# EAGLE board picodev (EAGLE 9.6.2)
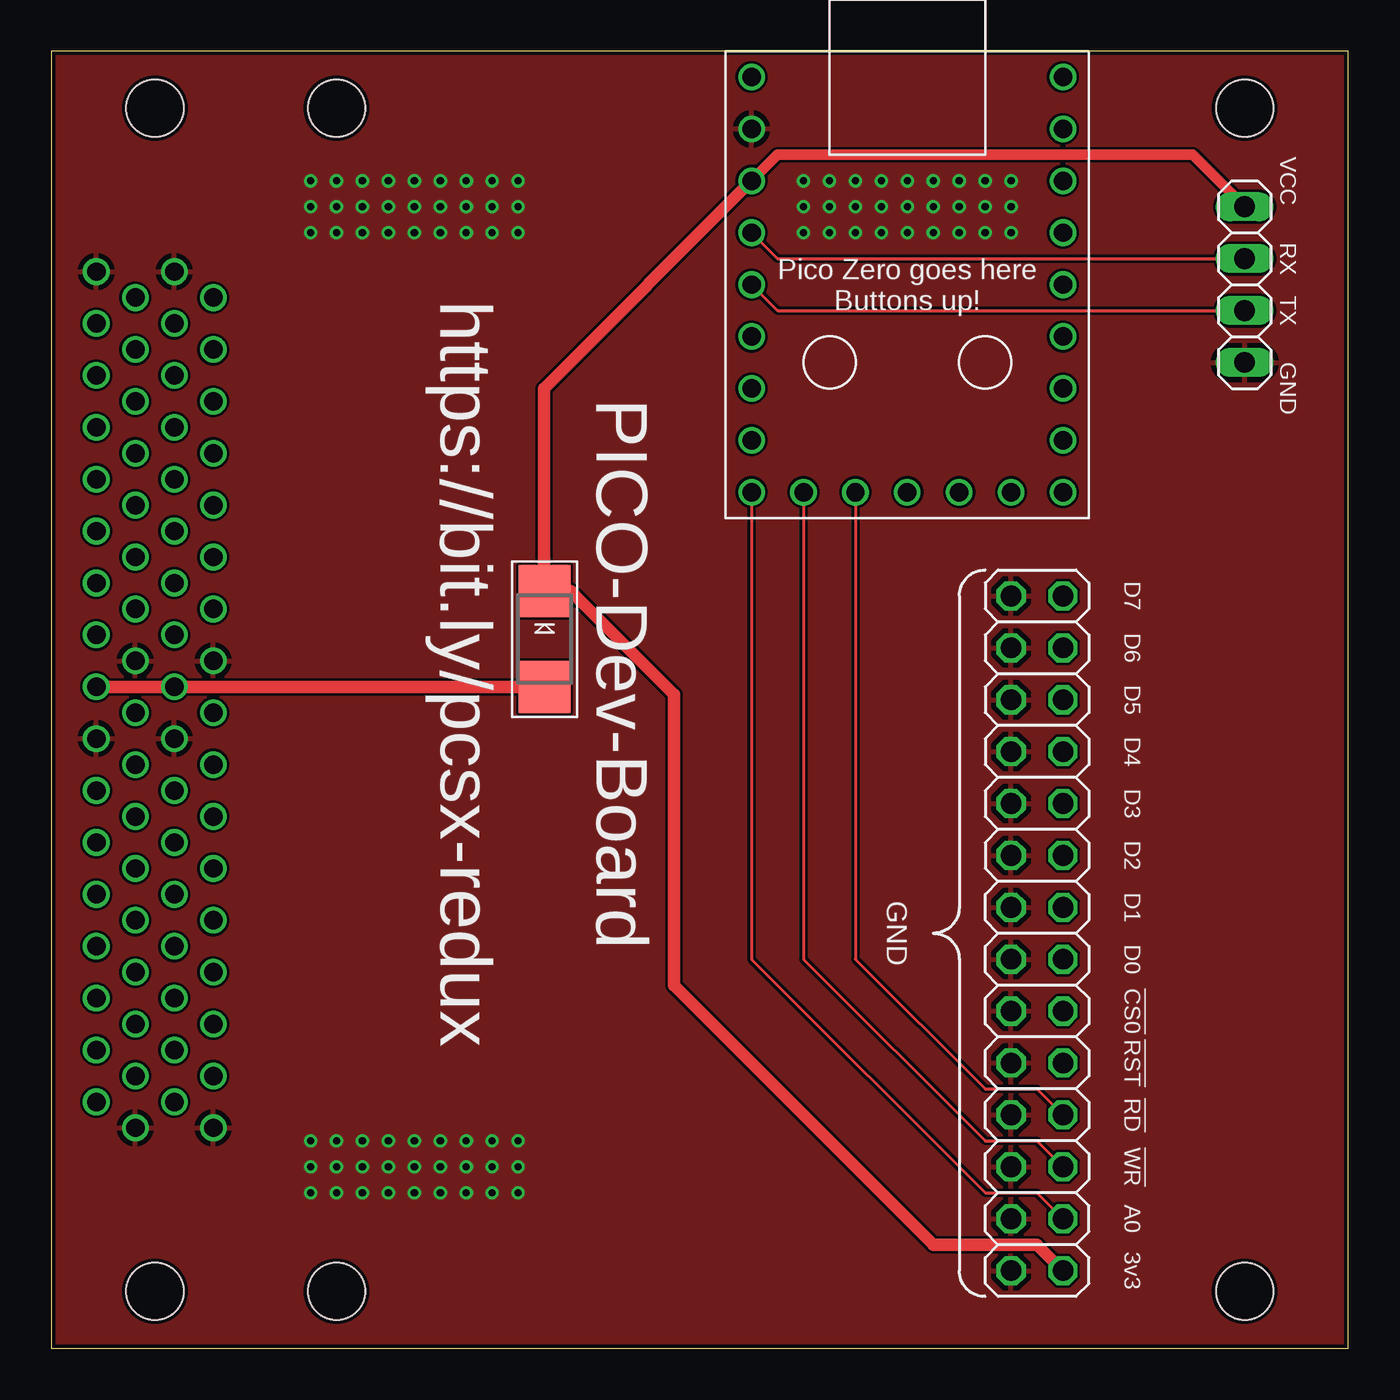
[diagram p0: board, top side]
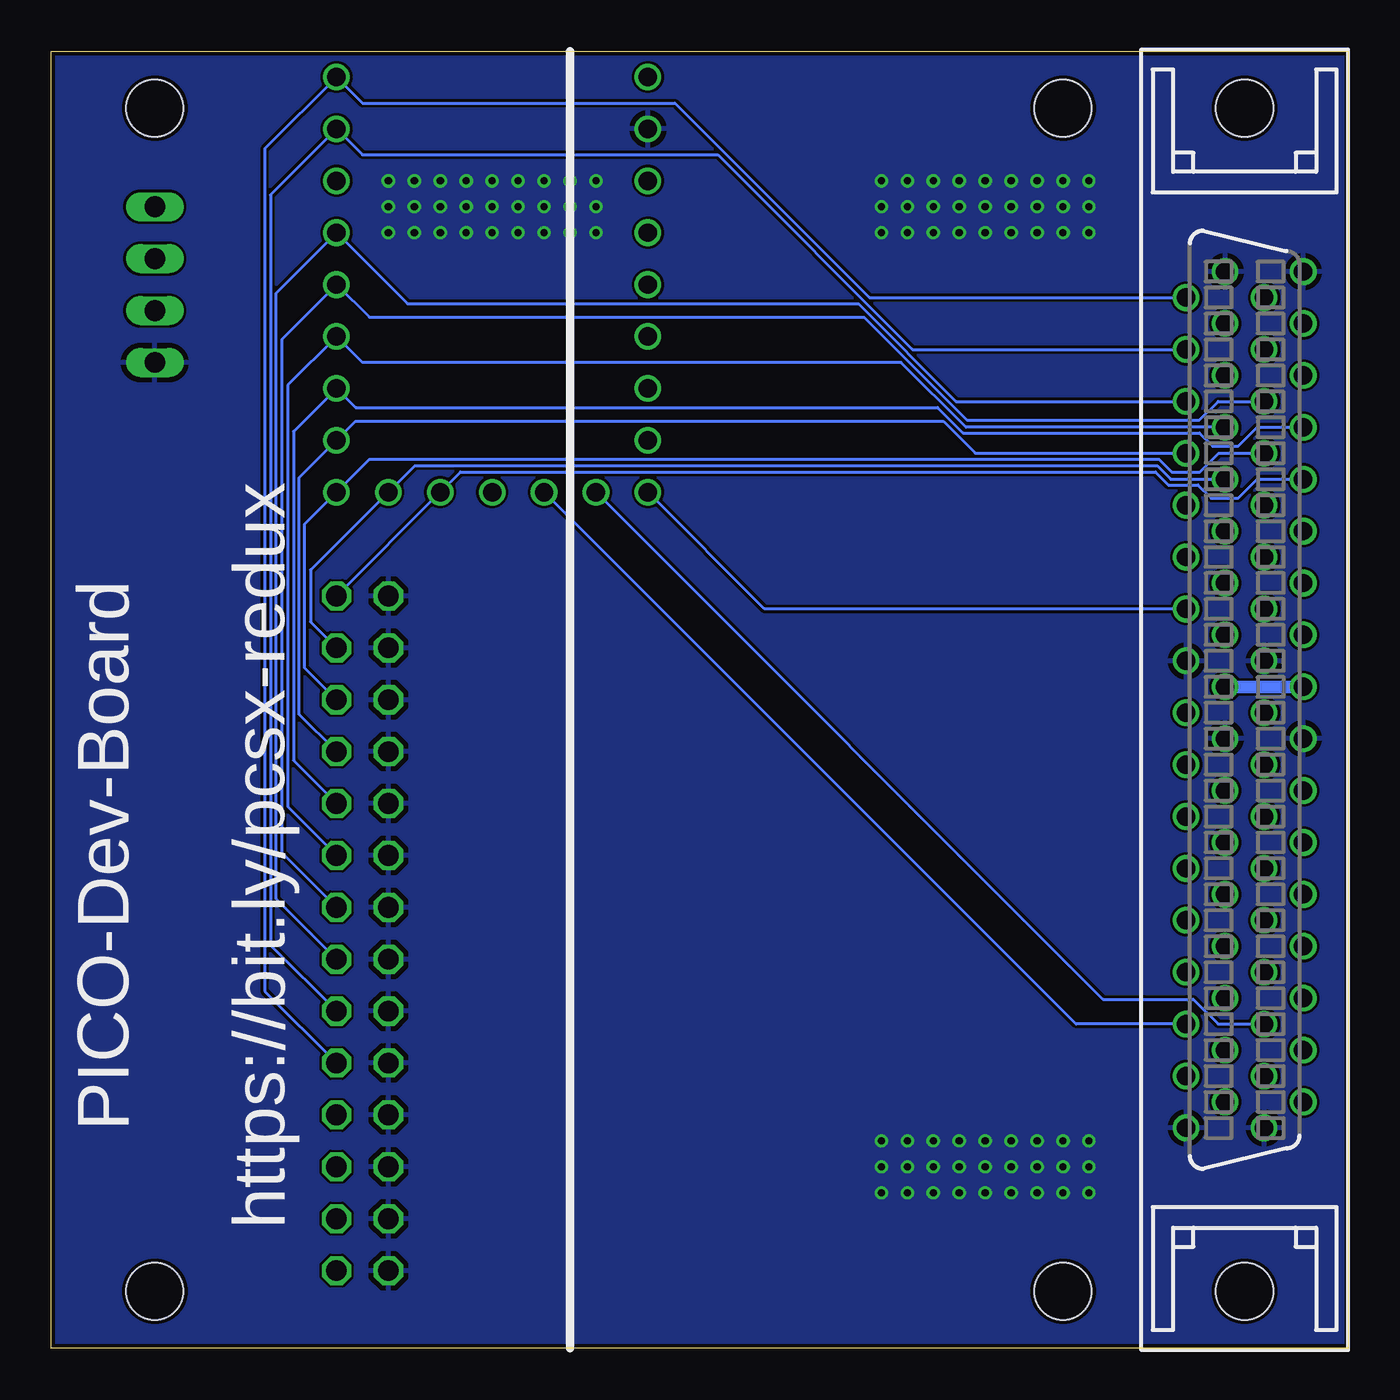
[diagram p1: board, bottom side, seen from below]

Size 63.5 x 63.5 mm. Coordinates in mm from the lower left corner, seen from the top.
Outline: 0,0 63.5,0 63.5,63.5 0,63.5 0,0
Copper layers (1*16): Top 0.035mm / dielectric 1.5mm / Bottom 0.035mm
Design rules "default *": minimum track width 5mil, minimum drill 0.2mm, track to track 5mil, track to pad 0.2mm, pad to pad 5mil, via to via 0.2mm, smd to smd 5mil, copper to edge 0.2mm, drill to drill 6mil, minimum pad ring 8mil, minimum via ring 0.15mm, stop-mask expansion 4mil, vias tented up to drill 25mil, thermal gap 10mil
Holes 2.79 mm at 58.42,60.71 58.42,2.79 13.97,60.71 13.97,2.79

## Footprints (pad centres in the part's own frame; a part is rotated, then mirrored left to right if it is on the bottom)
SMADIODE = smd 2.54 x 2.54: A 2.349,0; C -2.349,0
2X14 = drill 1.016 octagon: 1 -16.51,-1.27; 2 -16.51,1.27; 3 -13.97,-1.27; 4 -13.97,1.27; 5 -11.43,-1.27; 6 -11.43,1.27; 7 -8.89,-1.27; 8 -8.89,1.27; 9 -6.35,-1.27; 10 -6.35,1.27; 11 -3.81,-1.27; 12 -3.81,1.27; 13 -1.27,-1.27; 14 -1.27,1.27; 15 1.27,-1.27; 16 1.27,1.27; 17 3.81,-1.27; 18 3.81,1.27; 19 6.35,-1.27; 20 6.35,1.27; 21 8.89,-1.27; 22 8.89,1.27; 23 11.43,-1.27; 24 11.43,1.27; 25 13.97,-1.27; 26 13.97,1.27; 27 16.51,-1.27; 28 16.51,1.27
PIOCONN = drill 0.9 pad 1.27: 1 20.955,0.953; 2 19.685,2.863; 3 18.415,0.953; 4 17.145,2.863; 5 15.875,0.953; 6 14.605,2.863; 7 13.335,0.953; 8 12.065,2.863; 9 10.795,0.953; 10 9.525,2.863; 11 8.255,0.953; 12 6.985,2.863; 13 5.715,0.953; 14 4.445,2.863; 15 3.175,0.953; 16 1.905,2.863; 17 0.635,0.953; 18 -0.635,2.863; 19 -1.905,0.953; 20 -3.175,2.863; 21 -4.445,0.953; 22 -5.715,2.863; 23 -6.985,0.953; 24 -8.255,2.863; 25 -9.525,0.953; 26 -10.795,2.863; 27 -12.065,0.953; 28 -13.335,2.863; 29 -14.605,0.953; 30 -15.875,2.863; 31 -17.145,0.953; 32 -18.415,2.863; 33 -19.685,0.953; 34 -20.955,2.863; 35 20.955,-2.867; 36 19.685,-0.957; 37 18.415,-2.867; 38 17.145,-0.957; 39 15.875,-2.867; 40 14.605,-0.957; 41 13.335,-2.867; 42 12.065,-0.957; 43 10.795,-2.867; 44 9.525,-0.957; 45 8.255,-2.867; 46 6.985,-0.957; 47 5.715,-2.867; 48 4.445,-0.957; 49 3.175,-2.867; 50 1.905,-0.957; 51 0.635,-2.867; 52 -0.635,-0.957; 53 -1.905,-2.867; 54 -3.175,-0.957; 55 -4.445,-2.867; 56 -5.715,-0.957; 57 -6.985,-2.867; 58 -8.255,-0.957; 59 -9.525,-2.867; 60 -10.795,-0.957; 61 -12.065,-2.867; 62 -13.335,-0.957; 63 -14.605,-2.867; 64 -15.875,-0.957; 65 -17.145,-2.867; 66 -18.415,-0.957; 67 -19.685,-2.867; 68 -20.955,-0.957 | hole 2.8: -28.955,0; 28.955,0
PICO-ZERO = drill 0.9 pad 1.27: 1 7.62,10.16; 2 7.62,7.62; 3 7.62,5.08; 4 7.62,2.54; 5 7.62,0; 6 7.62,-2.54; 7 7.62,-5.08; 8 7.62,-7.62; 9 7.62,-10.16; 10 5.08,-10.16; 11 2.54,-10.16; 12 0,-10.16; 13 -2.54,-10.16; 14 -5.08,-10.16; 15 -7.62,-10.16; 16 -7.62,-7.62; 17 -7.62,-5.08; 18 -7.62,-2.54; 19 -7.62,0; 20 -7.62,2.54; 21 -7.62,5.08; 22 -7.62,7.62; 23 -7.62,10.16
1X04 = drill 1.016 long: 1 -3.81,0; 2 -1.27,0; 3 1.27,0; 4 3.81,0

## Placement (x,y rotation side)
D  SCHOTTKYSMA  [SMADIODE]  24.16,34.72 270 top
JP1  [2X14]  48.26,20.32 270 top
PIO  PIOCONNPIOCONN-S  [PIOCONN]  5.08,31.75 90 bottom
U$1  PICO-ZERO  [PICO-ZERO]  41.91,52.07 0 top
UART  [1X04]  58.42,52.07 90 top

## Library data of the parts
D PIO U$1 = pixel
JP1 UART = pinhead

## Nets
!CS0: JP1.18 PIO.4 U$1.2
!RD: JP1.22 PIO.30 U$1.13
!RESET: JP1.20 PIO.2 U$1.1
!WR: JP1.24 PIO.64 U$1.14
A0: JP1.26 PIO.14 U$1.15
A1: PIO.48
A2: PIO.15
A3: PIO.49
A4: PIO.20
A5: PIO.54
A6: PIO.21
A7: PIO.55
A8: PIO.22
A9: PIO.56
A10: PIO.23
A11: PIO.57
A12: PIO.24
A13: PIO.58
A14: PIO.25
A15: PIO.59
A16: PIO.26
A17: PIO.60
A18: PIO.27
A19: PIO.61
A20: PIO.28
A21: PIO.62
A22: PIO.29
A23: PIO.63
D0: JP1.16 PIO.6 U$1.4
D1: JP1.14 PIO.40 U$1.5
D2: JP1.12 PIO.7 U$1.6
D3: JP1.10 PIO.41 U$1.7
D4: JP1.8 PIO.8 U$1.8
D5: JP1.6 PIO.42 U$1.9
D6: JP1.4 PIO.9 U$1.10
D7: JP1.2 PIO.43 U$1.11
GND: JP1.1 JP1.3 JP1.5 JP1.7 JP1.9 JP1.11 JP1.13 JP1.15 JP1.17 JP1.19 JP1.21 JP1.23 JP1.25 JP1.27 PIO.1 PIO.16 PIO.19 PIO.34 PIO.35 PIO.50 PIO.53 PIO.68 U$1.22 UART.1
PIOVCC33: D.A PIO.17 PIO.51
RX: U$1.20 UART.3
TX: U$1.19 UART.2
VCC33: D.C JP1.28 U$1.21 UART.4

## Tracks (layer width: path | path; a pad name or v marks a point on that pad's centre or on a via)
!CS0
  Bottom 0.152: PIO.4 21.34,48.9 30.86,58.42 48.26,58.42 U$1.2 52.76,56.46 52.76,19.74 JP1.18
!RD
  Top 0.152: JP1.22 48.26,12.7 45.72,12.7 39.37,19.05 U$1.13
  Bottom 0.152: PIO.30 13.34,15.88 U$1.13
!RESET
  Bottom 0.152: PIO.2 23.44,51.44 32.97,60.96 48.26,60.96 U$1.1 53.03,58.73 53.03,17.48 JP1.20
!WR
  Top 0.152: U$1.14 36.83,19.05 45.72,10.16 48.26,10.16 JP1.24
  Bottom 0.152: U$1.14 12.01,17.09 7.59,17.09 6.38,15.88 PIO.64
A0
  Top 0.152: U$1.15 34.29,19.05 45.72,7.62 48.26,7.62 JP1.26
  Bottom 0.152: U$1.15 28.57,36.2 PIO.14
D0
  Bottom 0.152: PIO.6 19.2,46.35 23.98,51.13 46.05,51.13 U$1.4 52.48,51.66 52.48,22 JP1.16
D1
  Bottom 0.152: U$1.5 49.52,52.07 | 49.52,52.07 47.92,50.47 23.71,50.47 18.67,45.43 7.3,45.43 6.38,46.35 PIO.40 | JP1.14 52.2,24.26 52.2,49.39 49.52,52.07
D2
  Bottom 0.152: PIO.7 18.72,45.09 21.9,48.26 48.26,48.26 U$1.6 51.92,47.14 51.92,26.52 JP1.12
D3
  Bottom 0.152: PIO.41 4.46,45.09 5.39,44.16 6.64,44.16 7.29,44.81 18.86,44.81 20.11,46.05 48.59,46.05 U$1.7 51.64,44.88 51.64,28.78 JP1.10
D4
  Bottom 0.152: PIO.8 18.27,43.81 19.83,45.38 48.59,45.38 U$1.8 51.36,42.62 51.36,31.04 JP1.8
D5
  Bottom 0.152: PIO.42 6.35,43.81 7.28,42.89 8.63,42.89 9.27,43.52 47.92,43.52 U$1.9 51.08,40.36 51.08,33.3 JP1.6
D6
  Bottom 0.152: PIO.9 8.69,42.55 9.35,43.2 45.7,43.2 U$1.10 50.8,38.1 50.8,35.56 JP1.4
D7
  Bottom 0.152: PIO.43 4.47,42.55 5.4,41.62 6.72,41.62 7.37,42.27 8.81,42.27 9.44,42.9 43.46,42.9 U$1.11 JP1.2
GND  (via drill 0.35)
  other vias: 36.83,57.15 38.1,57.15 39.37,57.15 40.64,57.15 41.91,57.15 43.18,57.15 44.45,57.15 45.72,57.15 46.99,57.15 36.83,55.88 38.1,55.88 39.37,55.88 40.64,55.88 41.91,55.88 43.18,55.88 44.45,55.88 45.72,55.88 46.99,55.88 46.99,54.61 45.72,54.61 44.45,54.61 43.18,54.61 41.91,54.61 40.64,54.61 39.37,54.61 38.1,54.61 36.83,54.61 12.7,10.16 13.97,10.16 15.24,10.16 16.51,10.16 17.78,10.16 19.05,10.16 20.32,10.16 21.59,10.16 22.86,10.16 12.7,8.89 13.97,8.89 15.24,8.89 16.51,8.89 17.78,8.89 19.05,8.89 20.32,8.89 21.59,8.89 22.86,8.89 22.86,7.62 21.59,7.62 20.32,7.62 19.05,7.62 17.78,7.62 16.51,7.62 15.24,7.62 13.97,7.62 12.7,7.62 12.7,57.15 13.97,57.15 15.24,57.15 16.51,57.15 17.78,57.15 19.05,57.15 20.32,57.15 21.59,57.15 22.86,57.15 12.7,55.88 13.97,55.88 15.24,55.88 16.51,55.88 17.78,55.88 19.05,55.88 20.32,55.88 21.59,55.88 22.86,55.88 22.86,54.61 21.59,54.61 20.32,54.61 19.05,54.61 17.78,54.61 16.51,54.61 15.24,54.61 13.97,54.61 12.7,54.61
  pour Top: 0,63.5 63.5,63.5 63.5,0 0,0
  pour Bottom: 0,63.5 63.5,63.5 63.5,0 0,0
PIOVCC33
  Top 0.61: PIO.51 PIO.17 24.14,32.38 D.A
  Bottom 0.61: PIO.51 5.97,32.38
RX
  Top 0.152: U$1.20 35.56,53.34 UART.3
TX
  Top 0.152: U$1.19 35.56,50.8 UART.2
VCC33
  Top 0.508: U$1.21 35.55,58.42 55.88,58.42 UART.4
  Top 0.61: U$1.21 24.13,46.99 24.13,37.1 D.C 25.43,37.07 30.48,32.02 30.48,17.78 43.18,5.08 48.26,5.08 JP1.28

## Text on the board
tPlace: Pico Zero goes here / Buttons up! | GND
tNames: VCC | RX | TX | GND | D7 | D6 | PICO-Dev-Board / / https://bit.ly/pcsx-redux | D5 | D4 | D3 | D2 | D1 | D0 | !CS0 | !RST | !RD | !WR | A0 | 3v3
bNames: PICO-Dev-Board / / https://bit.ly/pcsx-redux